# Altium PCB Arduino_DUE_Magic_Pen_rev02.PcbDoc (part 2 of 2)
Units mil, origin at the board's own origin, x right, y up, seen from the top; angles counter-clockwise.
Board outline 4416.66 x 2112 mil, 4 copper layers (Top Layer, Mid-Layer 1, Mid-Layer 2, Bottom Layer); 151 components, 188 nets, 610 pads, 219 vias.
Unrouted connection lines stored in the file: 1.
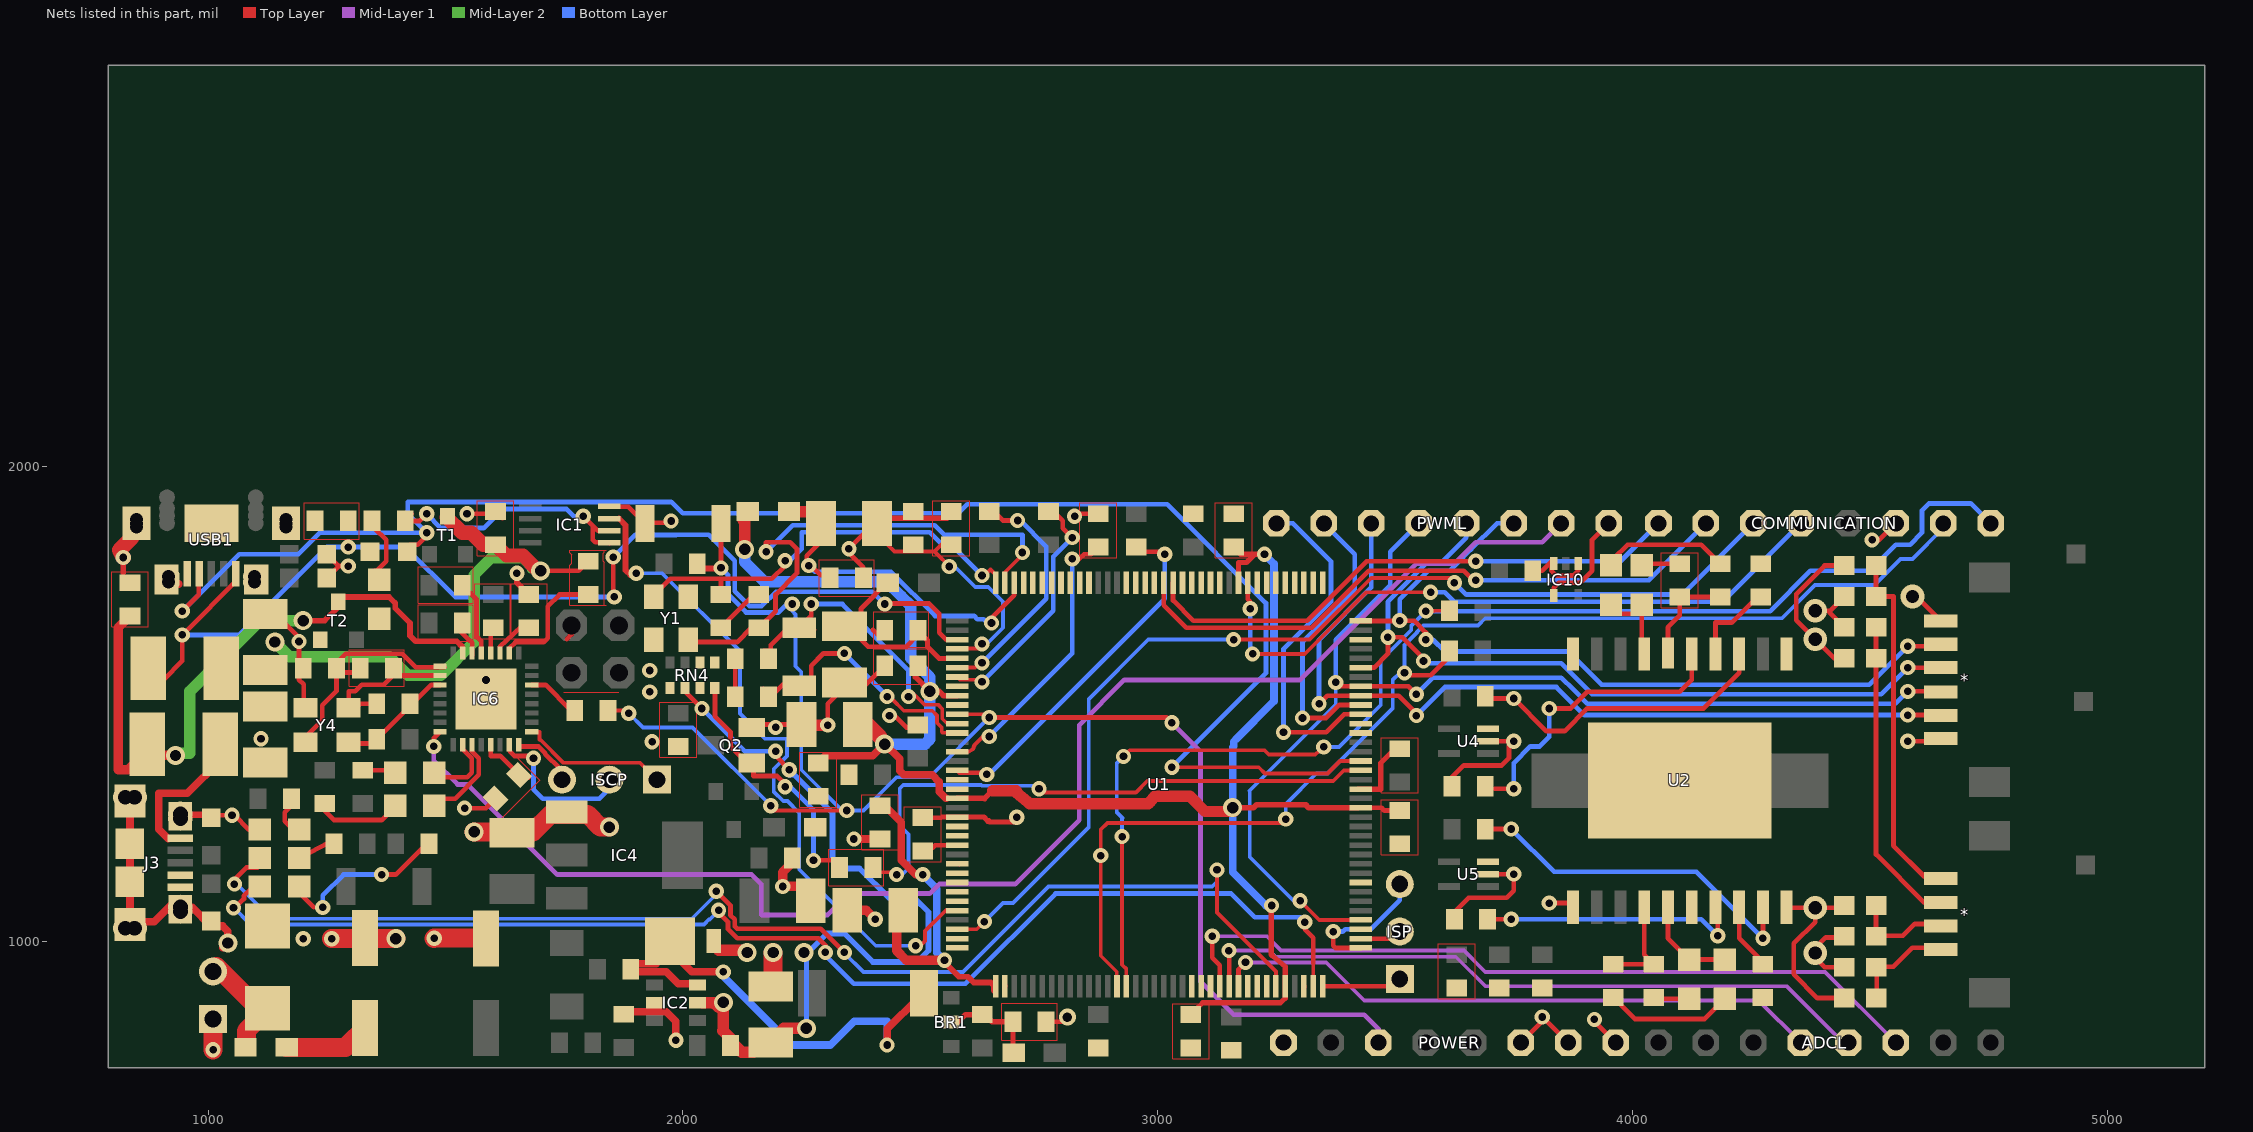
[diagram p4: the nets of this part, all layers, seen from the top]

## Via types
v1: diameter 32, hole 16, Top Layer to Bottom Layer, 189 vias
v2: diameter 40, hole 24, Top Layer to Bottom Layer, 23 vias
v3: diameter 50, hole 28, Top Layer to Bottom Layer, 5 vias
v4: diameter 32/32/32/32 (per signal layer), hole 16, Top Layer to Bottom Layer, 1 vias
v5: diameter 36, hole 20, Top Layer to Bottom Layer, 1 vias

## Nets (pads, with @x,y where several pads share a name; then routed paths per layer and width w, separated by ;. In a path a pad name is that pad's centre, name@x,y a point inside that pad or via, vN(x,y) a via of type N, cw(c..) or ccw(c..) an arc to the next point about the centre after c; other vN are vias at no path point) (continued)
GND: *.6 C1.- C2.- C3.- C4.1 C5.1 C6.1 C7.1 C8.1 C9.1 C10.1 C11.- C12.1 C13.1 C14.1 C15.1 C16.1 C17.1 C18.1 C19.1 C21.1 C22.1 C23.1 C24.1 C25.2 C26.2 C27.- C28.2 C29.- C30.1 C31.1 C32.1 C33.- C34.1 C35.- C36.2 C37.2 C38.2 C39.1 C40.1 C41.- C43.2 C44.2 C45.2 COMMUNICATION.6 D1.A D4.P$2 DM2.A DM4.A DM6.A DM8.A IC1.4 IC2.2 IC4.1 IC6.3 IC6.28 IC6.33 IC10.1 IC10.3 J3.P5 J3.P$1 J3.P$2 J3.P$3 J3.P$4 J3.P$5 J3.P$6 J3.P$7 J3.P$8 J3.S1 J3.S2 J3.S3 J3.S4 J3.S5 J3.S6 L.C ON.C P1.1 PC1.- PC2.- POWER.6 POWER.7 Q2.2 R2.2 R7.1 R8.1 R11.2 R18.2 RESET.2 RN4.1 RN4.2 RN4.5 RN4.7 T2.3 U1.12 U1.33 U1.44 U1.46 U1.54 U1.58 U1.74 U1.106 U1.126 U2.P$1 U2.P$10 U2.P$11 U2.P$20 U2.P$21 U4.3 U5.3 USB1.5 USB1.P$1 USB1.P$2 USB1.P$3 USB1.P$4 USB1.P$5 USB1.P$6 USB1.P$7 USB1.P$8 USB1.P$9 USB1.P$10 USB1.P$11 USB1.S1 USB1.S2 USB1.S3 USB1.S4 Y1.2 Y1.4 Y4.2 Y4.4 Z1.2 Z2.2 Z3.1 Z4.1 Z5.1 | length 5909.3
  Top Layer w2: 3471.3,1312.01 3494,1312.01 3494.31,1312.31 3504.31,1312.31 3504.61,1312.01 3548.7,1312.01
  Top Layer w8: U1.33@2717.55,1755.2 U1.33@2717.98,1761 ; U1.126@3428.18,1320.16 3429.82,1320.16 U1.126@3429.98,1320
  Top Layer w10: J3.S2@835,1051 J3.P$5@845,1041 ; J3.P$7@928,1083 J3.P$7@941,1083 ; Z3.1@1006,1259.74 1011.26,1265 v1(1050,1265) ; v1@1054.66,1266 1085.66,1235 ON.C@1100,1235 ; C27.-@1116,1675.06 1119.94,1679 1152.01,1679 1191,1640.01 v1(1191,1631) 1191,1551 1201,1541 Y4.4@1201,1496 ; Z2.2@1249.37,1765 1274.37,1790 ; Z1.2@1249.37,1815 1274.37,1790 ; Y4.2@1291,1416 C36.2@1355,1416 ; v1(1295,1790) 1274.37,1790 ; C36.2@1355,1435 C36.2@1355,1425 C40.1@1427.5,1497.5 ; C40.1@1425,1500 1430,1500 1469.53,1539.53 IC6.3@1488.54,1539.53 ; IC6.33@1530,1536 1536.76,1530.1 1572.52,1532.53 IC6.33@1643.45,1532.53 ; v1(1540,1280) 1585,1280 R18.2@1605.25,1300.25 ; v1(1545,1900) 1601,1900 1606,1905 R2.2@1620,1891 ; PC2.-@1584.49,1006 PC2.-@1585,1005.49 ; IC6.28@1594.84,1606.46 1594.84,1637.01 1594.84,1654.84 C30.1@1600,1660 ; C29.-@1610,1240.06 C29.-@1620.06,1230 ; IC1.4@1845,1915.59 1845.59,1915 1885,1915 RESET.2@1920,1880 ; RESET.2@1922,1883 1924,1881 v1@1975,1881 ; C22.1@2080,1660 C22.1@2095.71,1660 ; C22.1@2085,1665 2146,1726 C21.1@2160,1726 ; C23.1@2110,1515 C24.1@2110,1581.5 ; v2@2130,981 v2(2135,976) ; Q2.2@2150,1456 2275.94,1456 C11.-@2245.94,1486 ; 2169.25,1531.75 2175,1526 2175,1511 ; C41.-@2170,900.06 C41.-@2190,920.06 ; C1.-@2239.06,1115 C1.-@2269.06,1085 ; v1(2305,1455) 2305,1500 2345,1540 2385,1540 C15.1@2425,1580 ; C32.1@2380,1765 2380,1787.15 2349.53,1817.62 v1(2349.53,1826.47) C33.-@2384.06,1861 ; v1(2435,1475) 2445.71,1475 2470.71,1450 C6.1@2480,1450 ; C14.1@2505,1260 2544,1260 2545.1,1261.1 U1.58@2577.78,1261.1 ; C34.1@2765,830 2787.99,830 2800,830 v5(2810,840) ; v1@2826.3,1896.3 v1(2825,1895) 2826.3,1893.7 2826.3,1903.7 2830,1900 R8.1@2875,1900 ; POWER.6@3770,805 3780.8,805 3782.4,803.4 3810,831 v1(3810,840) 3811,840 POWER.7@3865,786 ; C37.2@3780,1780 3810,1780 3829.41,1799.41 3829.41,1780.59 3840,1770 3875,1770 3885.59,1780.59 IC10.1@3885.59,1795 ; v1(3825,1080) 3866,1080 U2.P$1@3875,1071 ; U2.P$10@4325,1071 4326,1070 v3(4385,1070) ; DM6.A@4446.54,880 4390,880 4340,930 4340,995 4385,1040 v3(4385,1070) ; DM8.A@4446.54,1075 4441.54,1070 v3(4385,1070) ; DM2.A@4446.54,1596 4425,1596 v3(4385,1636) 4345,1676 4345,1731 4405,1791 DM4.A@4446.54,1791 ; v1(4505,1845) 4520,1845 COMMUNICATION.6@4555,1880 ; v1(4580,1421) 4644.61,1421 *.6@4650,1426.39
  Top Layer w11: U1.58@2577.78,1261.1 2633.88,1261.1 2641.98,1253 ; 2643.98,1253 2645.98,1251 v1@2701.98,1251 ; U1.74@2678.18,904.8 U1.74@2678.18,905.8 ; U1.106@3308.1,902.88 U1.106@3308.1,904.8 ; U1.126@3421.98,1320 3429.98,1320 3469.98,1320 3469.98,1374.98 C8.1@3495,1400
  Top Layer w12: 821,1776 v1(821,1808.06) ; v1(1650,1775) 1650,1755 C38.2@1675,1730 ; C33.-@2409.06,1880 2420.06,1891 2556,1891 C25.2@2565,1900 ; 2641.98,1253 2643.98,1253
  Top Layer w14: J3.P$1@941,1282 941,1266 999.74,1266 Z3.1@1006,1259.74
  Top Layer w16: J3.S2@835,1051 J3.P$3@835,1311 ; J3.P$5@845,1041 886,1041 J3.P$7@928,1083 ; USB1.P$10@897.69,1749.19 USB1.P$10@937.69,1752.19 ; J3.P$7@941,1078 951,1078 958,1071 966,1071 1005.37,1031.63 1030.37,1031.63 1041,1021 v2(1041,996) v2@1031,986 ; R11.2@1870,851 1965,851 1985,831 v1(1985,791) ; v1(2360,1215) 2405,1215 2414,1206 C10.1@2420,1206
  Top Layer w20: C18.1@2230,1185 2230,1165 2210,1145 v1(2210,1115) C1.-@2239.06,1115 ; C3.-@2345.94,1065 2386,1065 v1(2405,1046)
  Top Layer w24: D4.P$2@2075,981 v2@2130,981 ; C11.-@2275.94,1456 2276.94,1455 v1(2305,1455)
  Top Layer w32: v1(821,1808.06) 812.65,1824.03 838.98,1850.36 USB1.P$5@838.98,1856
  Top Layer w40: P1.1@1000,836 1010,826 v1(1010,771) ; v1(1260,1005) v2(1395,1005) ; v1@1475,1005 v1(1476,1006) ; v1@1480,1006 PC2.-@1584.49,1006 ; v2(1560,1230) 1684,1230 1721,1267 1798.94,1267 1825.94,1240 v2(1845,1240) ; C41.-@2190,920.06 v2(2190,976)
  other v1: 1200,1005 2702.98,1261 1935,1420 1111,1426 2195,1450 1930,1525 1585,1550 1930,1570 1975,1885
JTAG_TCK: U1.28
JTAG_TDI: U1.29
JTAG_TDO: U1.30 | length 12.3
  Top Layer w8: U1.30@2776.6,1755.2 2775.98,1753.82 2775.98,1745 U1.30@2777.98,1745
JTAG_TMS: U1.31 | length 6.8
  Top Layer w8: U1.31@2756.92,1755.2 U1.31@2756.98,1762
L13: IC1.1 IC1.2 RN3C.1 | length 572
  Top Layer w10: RN3C.1@1427.99,1900 1415,1887.01 RN3C.1@1415,1885 1445,1885 v1(1460,1900) ; v1(1790,1895) 1810,1875 ; IC1.1@1845,1838.81 1843.81,1840 1815,1840 1810,1845 1810,1875 ; IC1.2@1845,1864.41 1820.59,1864.41 1810,1875
  Bottom Layer w10: v1(1460,1900) 1490,1870 1580,1870 1620,1910 1755,1910 1770,1895 v1(1790,1895)
M1_EN: RM2.1
M1_IN: RM1.1 U5.2 | length 243.2
  Top Layer w10: RM1.1@3617.5,1053.5 3655,1091 3735,1091 3750,1106 v1(3750,1141) U5.2@3696,1141
M2_EN: RM5.1
M2_IN: RM4.1 U4.2 | length 249.7
  Top Layer w10: RM4.1@3620,1326 3620,1345 3645,1370 3725,1370 3740,1385 3740,1411 v1(3750,1421) U4.2@3696,1421
M_OUT1: R24.2 R25.2 U2.P$4 | length 218.3
  Top Layer w10: R25.2@3955,951 R25.2@3960,951 R24.2@4045,951 4025,971 U2.P$4@4025,1071
M_OUT2: L1.C L2.A U2.P$5 | length 203.6
  Top Layer w10: U2.P$5@4075,1071 4075,1006 L2.A@4120,961 L1.C@4195,961
M_OUT3: R26.2 R27.2 U2.P$16 | length 194.4
  Top Layer w10: U2.P$16@4075,1626 4075,1661 4100,1686 R27.2@4100,1725 R26.2@4185,1725
M_OUT4: L3.C L4.A U2.P$17 | length 151.7
  Top Layer w10: L4.A@3955,1689.66 4020,1689.66 4020,1610 U2.P$17@4025,1605
MASTER-RESET: C20.1 POWER.3 R23.2 RESET.1 U1.47 | length 3299.4
  Top Layer w8: R23.2@1842.13,1485.75 1880.07,1485.75 v1(1885.82,1480) ; v1(2185,1285) 2195,1275 v1(2345,1275) ; U1.47@2577.78,1477.64 2634.62,1477.64 2641.26,1471 v1(2645,1471)
  Top Layer w10: RESET.1@2070,1856 2080,1846 v1(2080,1786) ; v1(2645,1471) 3019,1471 v1(3030,1460)
  Top Layer w12: C20.1@2030,1785 2079,1785 v1(2080,1786)
  Mid-Layer 1 w10: v1(3030,1460) 3090,1400 3090,915 3160,845 3435,845 3465,815 POWER.3@3465,786
  Bottom Layer w8: v1@1889.63,1470.75 1890,1471.12 1890,1475.82 v1(1885.82,1480) 1915.82,1450 2020,1450 v1@2190,1280 ; v1(2230,1710) 2230,1695 2236.98,1688.02 2236.98,1579.02 2249,1567 2249,1360.8 2334.8,1275 v1(2345,1275) 2380,1275 2450,1345 2519,1345 v1(2645,1471)
  Bottom Layer w10: v1(2080,1786) 2095,1771 2095,1731 2133,1693 2132,1692 2200.8,1692 2218.8,1710 v1(2230,1710)
MISO: ISP.1 U1.108 | length 162.6
  Top Layer w10: U1.108@3347.47,904.8 3509.8,904.8 ISP.1@3510,905
MISO2: IC6.17 ISCP.1 | length 315.6
  Top Layer w8: IC6.17@1681.46,1441.1 1698,1441.1 1698,1424.39 1699.39,1423 1700.74,1423 1747.31,1376.43 ; 1746.64,1375.75 1909.25,1375.75 ISCP.1@1945,1340
MOSI: ISP.3 U1.109 | length 278
  Top Layer w8: U1.109@3428.18,985.51 U1.109@3429.98,985
  Top Layer w10: v1(3370,1020) 3370,990 3374.49,985.51 U1.109@3428.18,985.51
  Bottom Layer w10: v1(3370,1020) 3390,1020 3395,1025 3448.54,1025 3510,1086.46 ISP.3@3510,1105
MOSI2: IC6.16 ISCP.3 | length 134.1
  Top Layer w10: IC6.16@1653.9,1413.54 1657.44,1410 1695.36,1410 1710,1395.36 1710,1394 1741.25,1362.75 1742.25,1362.75 1745,1360 ISCP.3@1745,1340
N$1: IC6.26 R21.1 | length 513.5
  Top Layer w2: 1761.3,1707.01 1761.3,1791.6 1766,1796.3 1766,1813.7 1761.3,1818.4 1761.3,1822.99 ; 1833.7,1707.01 1833.7,1798.37 1832,1800.07 1832,1817.47 1833.7,1819.17 1833.7,1822.99
  Top Layer w10: IC6.26@1634.21,1606.46 1634.21,1616.83 1647.38,1630 1706.69,1630 1715,1638.31 1715,1705 1740,1730 R21.1@1800,1730 ; 1755,1636 1765,1646
Net*_1: *.1@4650,1132.18 DM3.A DM4.C | length 743.5
  Top Layer w10: DM4.C@4513.46,1791 DM3.A@4513.46,1726 4550,1726 4550,1201 4615,1136 *.1@4640,1136
Net*_2: *.2@4650,1081 DM1.A DM2.C | length 657.1
  Top Layer w10: DM1.A@4513.46,1661 DM2.C@4513.46,1596 4513.46,1182.54 4615,1081 *.2@4650,1081
Net*_3: *.3@4650,1031.79 DM7.A DM8.C | length 186.9
  Top Layer w10: DM8.C@4513.46,1076 DM8.C@4513.46,1075 4513.46,1011 4570,1011 4595,1036 *.3@4625,1036
Net*_4: *.4@4650,982.57 DM5.A DM6.C | length 206.6
  Top Layer w10: DM6.C@4515,881 4515,946 4550,946 4590,986 *.4@4640,986
NetBR1_2: BR1.2 C34.2 JR1.2 L3.1 | length 199.5
  Top Layer w10: L3.1@2695,765 C34.2@2695,830
  Top Layer w12: BR1.2@2575,825 2595,845 2636,845 2651,830 C34.2@2695,830
NetIC6_13: IC6.13 R18.1 | length 108.5
  Top Layer w10: IC6.13@1595,1400 1595,1390 1615,1390 1660.25,1344.75 R18.1@1674.75,1344.75
NetJ3_P4: J3.P4
NetL1_A: L1.A R25.1 | length 264.1
  Top Layer w10: R25.1@3965,876 4005,836 4152.68,836 L1.A@4195,878.32
NetL2_C: L2.C R24.1 | length 87.3
  Top Layer w10: R24.1@4032.68,878.32 L2.C@4120,878.32
NetL3_A: L3.A R27.1 | length 90.7
  Top Layer w10: L3.A@4020,1777.34 L3.A@4027.55,1784.89 ; L3.A@4020,1795 4061.3,1795 R27.1@4100,1795
NetL4_C: L4.C R26.1 | length 269
  Top Layer w10: L4.C@3960,1805 3990,1835 4145,1835 R26.1@4185,1795 ; R26.1@4170,1786 R26.1@4185,1786
NetL_A: L.A RN3C.2 | length 127.8
  Top Layer w10: RN3C.2@1350,1870 1375,1845 1375,1800 1350,1775 1350,1780 L.A@1355,1775
NetON_A: ON.A RN3D.2 | length 82.8
  Top Layer w10: RN3D.2@1175,1285 1161,1271 1161,1252.34 ON.A@1192.34,1221
NetPOWER_1: POWER.1
NetQ2_1: Q2.1 R3.2 RN4.8 | length 549.4
  Top Layer w10: RN4.8@2067.24,1533.43 2067.24,1473.71 2099.94,1441.01 2099.94,1410.06 2148.31,1361.69 2148.31,1347.6 2198.4,1347.6 2215,1331 v1(2215,1325) ; v1(2275,1170) 2320,1170 2330,1160 R3.2@2330,1155
  Bottom Layer w10: v1(2215,1325) 2226,1325 2275,1276 v1(2275,1170)
NetR4_1: R4.1 U1.53 | length 757.9
  Top Layer w10: U1.53@2577.78,1359.53 2582.56,1354.75 2636.25,1354.75 v1(2640,1351) ; R4.1@2960,1820 3020.83,1820 3015,1814.17 v1(3015,1815)
  Bottom Layer w10: v1(2640,1351) 2645,1351 3015,1721 v1(3015,1815)
NetR5_2: R5.2 U1.43 | length 513.7
  Top Layer w8: U1.43@2577.78,1556.38 2583.56,1550.6 2625.4,1550.6 v1(2630,1546)
  Top Layer w10: R5.2@2775,1900 2785,1900 2800,1885 2800,1870 v1(2820,1850)
  Bottom Layer w10: v1(2630,1546) 2780,1696 2780,1810 v1(2820,1850)
NetR6_2: R6.2 U1.42 | length 494.7
  Top Layer w8: U1.42@2576,1576 2615,1576 v1@2620,1581
  Top Layer w10: R6.2@2650,1910 2674,1886 v1(2705,1886)
  Bottom Layer w10: v1(2630,1586) 2765,1721 2765,1831 2710,1886 v1(2705,1886)
NetR8_2: R8.2 U1.51 | length 582.7
  Top Layer w8: U1.51@2590,1401 2599,1398 2611,1404 2614,1413 2632,1431 v1(2645,1431)
  Top Layer w10: v1(2820,1805) 2835,1805 2837.01,1807.01 2845,1815 2860,1815 R8.2@2875,1830
  Bottom Layer w10: v1(2645,1431) 2820,1606 v1(2820,1805)
NetR14_2: R14.2 TX1.A | length 171.6
  Top Layer w10: R14.2@1245,1290 1245,1275 1265,1255 1365,1255 TX1.A@1385,1275
NetR15_2: R15.2 RX1.A | length 68.7
  Top Layer w10: R15.2@1325,1360 RX1.A@1393.66,1360
NetRM1_2: RM1.2 U2.P$7 | length 561.6
  Top Layer w10: RM1.2@3695,1046 v1(3745,1046) ; U2.P$7@4175,1071 4180,1066 v1(4180,1011)
  Bottom Layer w10: v1(3745,1046) 4145,1046 v1(4180,1011)
NetRM2_2: RM2.2 U2.P$8 | length 121.6
  Top Layer w10: U2.P$8@4225,1071 4225,1006 RM2.2@4265,966
NetRM3_2: RM3.2 U2.P$9 | length 740.3
  Top Layer w10: RM3.2@3695,1236 v1(3745,1236) ; v1(4275,1006) U2.P$9@4275,1071
  Bottom Layer w10: v1(3745,1236) 3835,1146 4135,1146 v1(4275,1006)
NetRM4_2: RM4.2 U2.P$15 | length 631.8
  Top Layer w10: 3709.9,1321.1 3710,1321 v1(3750,1321) ; v1(3825,1490) 3870,1490 3905,1525 4100,1525 4125,1550 U2.P$15@4125,1605
  Bottom Layer w10: v1(3750,1321) 3750,1375 3785,1410 3805,1410 3825,1430 v1(3825,1490)
NetRM5_2: RM5.2 U2.P$14 | length 158.6
  Top Layer w10: U2.P$14@4175,1626 4175,1671 4209.29,1671 4254.29,1716 RM5.2@4270,1716
NetRM6_2: RM6.2 U2.P$13 | length 645.7
  Top Layer w10: RM6.2@3700,1511 v1(3750,1511) 3818.68,1442.32 3857.32,1442.32 3905,1490 4150,1490 4225,1565 U2.P$13@4225,1605
  Bottom Layer w10: v1(3750,1511) v1@3751,1510
NetRN3A_2: RN3A.2 RX.A | length 82.2
  Top Layer w10: RX.A@1191.34,1175 1255.4,1208.06 RN3A.2@1265,1205
NetRN3B_2: RN3B.2 TX.A | length 338.6
  Top Layer w10: TX.A@1192.34,1101 1222.34,1071 ; v4(1365,1140) 1395,1140 RN3B.2@1465,1210
  Bottom Layer w10: v1(1241,1071) 1241,1096 1285,1140 v4(1365,1140)
PIN22: U1.1
PIN23: U1.7
PIN24: U1.8
PIN25: U1.13 | length 4.8
  Top Layer w8: U1.13@3110.98,1760 U1.13@3111.25,1755.2
PIN26: U1.14
PIN27: U1.15 | length 0.3
  Top Layer w8: U1.15@3071.88,1754.9 U1.15@3071.88,1755.2
PIN28: U1.16 | length 2
  Top Layer w8: U1.16@3051.98,1753.2 U1.16@3052.19,1755.2
PIN29: U1.19
PIN30: U1.22
PIN31: U1.26 | length 10.8
  Top Layer w8: U1.26@2854.98,1766 U1.26@2855.34,1755.2
PIN32: U1.32
PIN33: U1.55 | length 4.3
  Top Layer w8: U1.55@2577.78,1320.16 U1.55@2581.98,1321
PIN34: U1.59 | length 4.2
  Top Layer w8: U1.59@2577.78,1241.42 U1.59@2581.98,1241
PIN35: U1.60
PIN36: U1.116 | length 4.3
  Top Layer w8: U1.116@3428.18,1123.31 3428.18,1122.8 U1.116@3431.98,1123
PIN37: U1.63 | length 4.5
  Top Layer w8: U1.63@2577.78,1162.68 U1.63@2581.98,1161
PIN38: U1.64
PIN39: U1.65
PIN40: U1.66
PIN41: U1.67
PIN42: U1.71
PIN43: U1.72 | length 3.8
  Top Layer w8: U1.72@2573.98,985 U1.72@2577.78,985.51
PIN44: U1.101
PIN45: U1.100 | length 0.2
  Top Layer w8: U1.100@3189.99,904.8 U1.100@3189.98,905
PIN46: ADCL.4 U1.99 | length 1296.3
  Top Layer w10: U1.99@3170.3,904.8 3170.3,940.3 v1(3185,955)
  Mid-Layer 1 w8: v1(3185,955) 3355,955 3435,875 4266,875 ADCL.4@4355,786
PIN47: ADCL.5 U1.98 | length 1461.5
  Top Layer w8: U1.98@3149.98,905 U1.98@3150.62,904.8
  Top Layer w10: v1(3150,980) 3150.62,979.38 U1.98@3150.62,904.8
  Mid-Layer 1 w8: v1(3150,980) 3235,980 3248,967 3628,967 3690,905 4325,905 4444,786 ADCL.5@4455,786
PIN48: ADCL.6 U1.97 | length 1644.6
  Top Layer w10: v1(3115,1010) 3115,965 3130.93,949.07 U1.97@3130.93,904.8
  Mid-Layer 1 w8: v1(3115,1010) 3230,1010 3260,980 3645,980 3690,935 4406,935 ADCL.6@4555,786
PIN49: U1.96 | length 7.9
  Top Layer w8: U1.96@3109.98,897 U1.96@3111.25,904.8
PIN50: U1.95
PIN51: U1.94 | length 1.7
  Top Layer w8: U1.94@3070.18,904.8 U1.94@3071.88,904.8
PWM2: *.2@4650,1625.21 PWML.3 U1.144 | length 1679.9
  Top Layer w8: U1.144@3421.98,1673 U1.144@3428.18,1674.49
  Top Layer w10: U1.144@3428.18,1674.49 3509.49,1674.49 v1(3510,1675) 3540,1675 3565,1650 v1(3565,1635) ; v1(4580,1621) 4645.79,1621 *.2@4650,1625.21
  Bottom Layer w10: v1(3510,1675) 3510,1720 3570,1780 3615,1780 3645,1810 3645,1810.36 3659.64,1825 3660,1825 3715,1880 PWML.3@3750,1880 ; v1(3565,1635) 3580,1635 3605,1610 3865,1610 3935,1540 4499,1540 v1(4580,1621)
PWM3: *.3@4650,1576 PWML.4 U1.139 | length 1676.8
  Top Layer w8: U1.139@3421.98,1577 U1.139@3428.18,1576.06
  Top Layer w10: U1.139@3428.18,1576.06 3456.06,1576.06 3485,1605 v1(3485,1640) 3515,1640 3560,1595 v1(3560,1590) ; v1(4580,1576) *.3@4650,1576
  Bottom Layer w10: v1(3485,1640) 3485,1715 3565,1795 3595,1795 3650,1850 PWML.4@3650,1880 ; v1(3560,1590) 3565,1585 3850.2,1585 3915.2,1520 4524,1520 v1(4580,1576)
PWM4: *.4@4650,1524.82 | length 1153.5
  Top Layer w10: v1(4580,1526) 4648.82,1526 *.4@4650,1524.82
  Bottom Layer w10: v1(3545,1520) 3579.9,1554.9 3850.3,1554.9 3876,1529.2 3905.2,1500 4554,1500 v1(4580,1526)
PWM5: *.5@4650,1475.61 PWML.6 U1.136 | length 1812.4
  Top Layer w10: v1(3340,1500) 3357.01,1517.01 U1.136@3428.18,1517.01 3507.99,1517.01 3545,1480 v1(3545,1475) ; v1(4580,1476) 4649.61,1476 *.5@4650,1475.61
  Bottom Layer w10: v1(3340,1500) 3340,1635 3450,1745 PWML.6@3450,1880 ; v1(3545,1475) 3605,1535 3840,1535 3899,1476 v1(4580,1476)
PWM6: PWML.7 U1.135 | length 623.2
  Top Layer w8: U1.135@3421.98,1497 U1.135@3428.18,1497.32
  Top Layer w10: v1(3305,1470) 3355,1470 3382.32,1497.32 U1.135@3428.18,1497.32
  Bottom Layer w10: v1(3305,1470) 3305,1630 3415,1740 3415,1815 PWML.7@3350,1880
PWM7: PWML.8 U1.134 | length 728.3
  Top Layer w10: v1(3265,1440) 3355,1440 3392.64,1477.64 U1.134@3428.18,1477.64
  Bottom Layer w10: PWML.8@3250,1880 3285,1880 3365,1800 3365,1715 3265,1615 v1(3265,1440)
PWM8: U1.133 | length 6.3
  Top Layer w8: U1.133@3421.98,1457 U1.133@3428.18,1457.95
PWM9: U1.132 | length 14.2
  Top Layer w8: U1.132@3413.98,1438 3417.71,1438.27 U1.132@3428.18,1438.27
PWM11: U1.20
PWM12: U1.21
PWM13: IC1.3 U1.68 | length 1417.1
  Top Layer w8: v1(2490,990) 2500,990 2510,1000 2510,1021 U1.68@2555,1066
  Top Layer w12: IC1.3@1865,1890 1879,1876 1879,1781 1889.13,1770.87 1893.26,1775 v1(1901.63,1775)
  Bottom Layer w8: v1(1901.63,1775) 1956,1775 2120,1611 2120,1479.3 2173.3,1426 2219,1426 2219,1390.06 2191,1362.06 2191,1315.06 2211.06,1295 2219.94,1295 2245,1269.94 2245,1151 2406,990 v1(2490,990)
RD+: IC6.29 R20.1 | length 158.9
  Top Layer w10: R20.1@1535,1750 1565,1720 1565,1642.01 1575,1632.01 IC6.29@1575,1607.62
RD-: IC6.30 R19.1 | length 187
  Top Layer w2: 1437.01,1631.3 1440.6,1631.3 1441.3,1632 1458.7,1632 1459.4,1631.3 1552.99,1631.3
  Top Layer w10: R19.1@1530,1660 1530,1654.17 1552.16,1632.01 1552.99,1632.01 1552.99,1631.3 1556.3,1627.99 IC6.30@1556.3,1600.94
RESET_CMD: IC6.22 R23.1 | length 125.4
  Top Layer w10: IC6.22@1681.46,1539.53 1710.47,1539.53 1762.72,1487.28 1762.49,1487.28 R23.1@1784.11,1481.75
RX: IC10.4 PWML.1 U1.27 | length 226.2
  Top Layer w10: IC10.4@3834.41,1728.08 3834.41,1744.41 3845,1755 3890,1755 3915,1780 3915,1845 PWML.1@3950,1880
RXD0: COMMUNICATION.2 U1.18 | length 1317.4
  Top Layer w10: U1.18@3012.82,1755.2 3012.82,1707.18 3060,1660 3325,1660 3445,1780 3645,1780 3665,1760 v1(3670,1760)
  Bottom Layer w10: v1(3670,1760) 4035,1760 COMMUNICATION.2@4155,1880
RXD1: U1.5
RXD2: U1.3
RXL: RX.C U1.103 | length 2713.5
  Top Layer w8: v1(3125,1150) 3125,1060 3249.04,935.96 U1.103@3249.04,904.8
  Top Layer w10: v1(1055,1120) 1055,1129.64 1080,1154.64 1080,1155 1103.66,1155 RX.C@1109.66,1161 ; v1(2070,1105) 2070.36,1105 2100,1075.36 2100,1054.8 2109,1045.8 2109,1030.8 2114,1025.8 2290.2,1025.8 v1(2340,976)
  Bottom Layer w8: v1@1060,1120 1133,1047 2018.56,1047 2070,1098.44 v1(2070,1105) ; v1@2339.5,975.5 2380,935 2590,935 2770,1115 3115,1115 3125,1125 v1(3125,1150) 3125,1128.91
RXL-U2: IC6.10 RX1.C | length 140.6
  Top Layer w10: RX1.C@1485,1345 1545,1345 1555,1355 1555,1385 1535.79,1404.21 IC6.10@1535.79,1413.54
SCK2: IC6.15 ISCP.2 | length 310.1
  Top Layer w10: IC6.15@1635,1400 1645,1390 v1@1680,1390
  Bottom Layer w10: v1(1685,1385) 1685,1320 1705,1300 1824,1300 1845,1321 ISCP.2@1845,1340
SCL0-3: COMMUNICATION.8 RN5B.2 U1.87 | length 2706.5
  Top Layer w8: v1(2925,1220) 2925,949.98 2933.98,941 2933.98,905 U1.87@2934.08,904.8 ; v1(2927.98,1389) 2940.98,1402 3224.98,1402 3233.98,1393 3331.98,1393 v1(3349.98,1409) ; v1(3565,1695) 3581,1695 3580,1696 RN5B.2@3610,1696
  Bottom Layer w8: v1(2925,1220) 2925,1258.02 2925.98,1259 2913.98,1271 2913.98,1375 v1(2927.98,1389) ; v1(3349.98,1409) 3381.98,1409 3470,1497.02 3470,1590.91 3534,1654.91 3534,1664 v1(3565,1695)
  Bottom Layer w10: v1(3565,1695) 4290,1695 4375,1780 4500,1780 4555,1835 4585,1835 4610,1860 4610,1907 4625,1922 4713,1922 COMMUNICATION.8@4755,1880
SCL1: COMMUNICATION.3 U1.70 | length 2218.6
  Top Layer w8: U1.70@2577.78,1024.88 2618.88,1024.88 v1(2635,1041) ; v1(3160,1635) 3320,1635 3450,1765 3615,1765 v1(3625,1755)
  Bottom Layer w8: v1(2635,1041) 2674,1080 2695,1080 2855,1240 2855,1510 2980,1635 v1(3160,1635)
  Bottom Layer w10: v1(3625,1755) 3650,1730 4105,1730 COMMUNICATION.3@4255,1880
SDA0-3: COMMUNICATION.7 RN5A.1 U1.86 | length 2609.3
  Top Layer w8: U1.86@2914.4,904.8 U1.86@2913.78,908.8 ; U1.86@2915.98,905 U1.86@2913.78,908.8 ; v1(3269.98,1257) 3261.98,1249 2894,1249 2880,1235 v1(2880,1180) 2880,968.98 2913.78,935.2 U1.86@2913.78,908.8
  Top Layer w10: v1@3510,1565 3515,1560 3575,1560 RN5A.1@3610,1595 ; RN5A.1@3610,1605 3615,1610 RN5A.1@3625,1610
  Bottom Layer w8: v1(3269.98,1257) 3269.98,1289 3333.98,1353 3358,1353 3495,1490 3495,1550 3510,1565 v1(3520,1565) 3520,1623.94 3546,1649.94 3546,1651 3560,1665 3675,1665 3690,1680 4315,1680 4385,1750 4510,1750 4565,1805 4590,1805 COMMUNICATION.7@4655,1870
SDA1: COMMUNICATION.4 U1.9 | length 1439.8
  Top Layer w8: U1.9@3189.98,1753 U1.9@3189.99,1755.2 ; v1(3200,1605) 3310,1605 3440,1735 v1(3575,1735)
  Top Layer w10: U1.9@3189.98,1753 3189.98,1720.02 3195,1715 v1(3195,1700)
  Bottom Layer w10: v1(3195,1700) 3195,1610 v1(3200,1605) ; v1(3575,1735) 3605,1735 3625,1715 4190,1715 COMMUNICATION.4@4355,1880
SPCK: ISP.2 U1.110 | length 81.9
  Top Layer w10: U1.110@3428.18,1005.2 3428.38,1005 ISP.2@3510,1005
SS0/PWM10: U1.102 U1.111 | length 6.9
  Top Layer w8: U1.102@3229.36,904.8 U1.102@3229.98,905 ; U1.111@3421.98,1025 U1.111@3428.18,1024.88
SS1/PWM4: PWML.5 U1.112 U1.137 | length 1332
  Top Layer w8: v1(3300,1085) 3295.87,1089.13 3340.43,1044.57 U1.112@3428.18,1044.57
  Top Layer w10: v1(3375,1545) 3383.31,1536.69 U1.137@3428.18,1536.69 3528.31,1536.69 3545,1520
  Bottom Layer w8: v1(3300,1085) 3285.98,1085 3193.98,1177 3193.98,1316.02 3193.49,1316.51 3375,1498.02 v1(3375,1545)
  Bottom Layer w10: v1(3375,1545) 3375,1635 3490,1750 3490,1820 PWML.5@3550,1880
SS3: U1.142
SW: C42.2 D4.P$1 IC2.6 L4.P$1 | length 968.5
  Top Layer w10: D4.P$1@1943.78,952.3 D4.P$1@1972.48,981
  Top Layer w16: C42.2@1890,941 1901.3,952.3 D4.P$1@1943.78,952.3 ; C42.2@1905,935 1965,935 1990,910 IC2.6@2020.28,910 ; D4.P$1@1972.48,981 2018.48,935 v1(2085,935) ; v1(2430,781) 2430,814.78 L4.P$1@2496.22,881
  Bottom Layer w16: v1(2085,935) 2085,926 2230,781 2310.4,781 2360.4,831 2430,831 v1(2430,781)
TX: IC6.8 PWML.2 U1.2 | length 3073.3
  Top Layer w10: v1(1475,1410) 1475,1427.56 IC6.8@1488.54,1441.1
  Mid-Layer 1 w10: v1(1475,1410) 1475,1380 1525,1330 1545,1330 1735,1140 2145,1140 2165,1120 2165,1055 2305,1055 2350,1100 2520,1100 2540,1120 2700,1120 2835,1255 2835,1455 2930,1550 3300,1550 3545,1795 3625,1795 3670,1840 3810,1840 PWML.2@3850,1880
TXD0: COMMUNICATION.1 U1.17 | length 1162.7
  Top Layer w10: U1.17@3032.51,1755.2 3032.51,1717.49 3075,1675 3315,1675 3440,1800 v1(3670,1800)
  Bottom Layer w10: v1(3670,1800) 3975,1800 COMMUNICATION.1@4055,1880
TXD1: U1.6
TXD2: U1.4
TXL: TX.C U1.107 | length 2687
  Top Layer w8: U1.107@3327.78,904.8 3327.78,952.78
  Top Layer w10: v1(1053.09,1070) 1056.17,1070 1075,1088.83 1075,1095 1090,1110 TX.C@1095,1110 ; v1(2075,1065) 2079,1065 2080,1064 2080,1055 2095,1040 2095,1025 2114.24,1005.76 2285.24,1005.76 2300,991 v1(2300,976) ; v1(3310,1040) 3310,1025 3327.78,1007.22 3327.78,952.78
  Bottom Layer w8: v1(1053.09,1070) 1053.09,1071.09 1089.17,1035 2044,1035 2055,1046 2056,1045 2076,1065 v1(2075,1065)
  Bottom Layer w10: v1(2300,976) 2300,970 2360,910 2595,910 2785,1100 3155,1100 3205,1050 3300,1050 v1(3310,1040)
TXL-U2: IC6.11 TX1.C | length 161.8
  Top Layer w10: TX1.C@1485,1300 1519.8,1300 1570,1350.2 1570,1385 IC6.11@1555,1400
UOTGID: U1.129 USB1.4 Z5.2 | length 3562.6
  Top Layer w8: v1(3030,1366) 3212.98,1366 3225.98,1353 3357.98,1353 3384.19,1379.21 U1.129@3428.18,1379.21
  Top Layer w10: v1(945,1695) 980,1730 USB1.4@980,1775 ; Z5.2@1425,1835 1440.83,1835 1460,1854.17 v1(1460,1860)
  Bottom Layer w10: v1(945,1695) 1065,1815 1190,1815 1235,1860 v1(1460,1860) 1420,1900 1420,1925 1975.36,1925 1999.36,1901 2580,1901 2599,1920 3020,1920 3228,1712 3228,1564 v1(3030,1366)
UOTGVBOF: R3.1 U1.128 | length 1265.3
  Top Layer w8: R3.1@2405,1145 2414.49,1145 v1@2445,1145 ; v1(2750,1321) 2758,1313 2953.98,1313 2977.98,1337 3369.98,1337 3391.98,1359 3419.98,1359 U1.128@3428.18,1359.53
  Bottom Layer w8: v1(2450,1140) 2450,1128.51 2475,1153.51 2475,1225 2456.49,1243.51 2456.49,1321.49 2464,1329 2546.98,1329 2628.06,1329 2630.06,1327 2747.98,1327 2750,1324.98 v1(2750,1321)
USBVCC: C27.+ C35.+ F1.1 R2.1 R21.2 T1.1 | length 1101.4
  Top Layer w10: v2(1700,1780) 1780,1780 R21.2@1800,1800
  Top Layer w30: T1.1@1502,1893 1535,1860 1554,1860 1579,1835 R2.1@1595,1835 ; R2.1@1605,1835 1627.99,1812.01 1662.99,1812.01 v2@1690,1785
  Mid-Layer 2 w24: v2(1140,1630) 1171,1599 1381,1599 1420,1560 1490,1560 1560,1630 1560,1771 1599,1810 1602,1807 1663.25,1807 1682,1788.25 1682,1785 v2@1683,1785
USBVCCU2: C28.1 F2.1 IC6.31 T2.1 | length 1379.4
  Top Layer w12: v2(1200,1675) 1200,1687 1212,1675 1245,1675 1274,1704 T2.1@1274,1715 1284,1725 1380.9,1725 1393.62,1712.28 1393.62,1701.38 1425,1670 1425,1643.31 1437.01,1631.3 1523.7,1631.3 IC6.31@1535,1620
  Top Layer w20: C28.1@835,1685 810,1660 810,1361 831,1361 866,1396 871,1391 v2(931,1391)
  Mid-Layer 2 w24: v2(931,1391) 936,1396 961,1396 961,1526 1110,1675 v2(1200,1675)
VBG: C25.1 R7.2 U1.40 | length 513.7
  Top Layer w8: 2430,1836 2445.49,1820.51 2530,1820.51 ; C25.1@2565,1838.5 2547.5,1838.5 2530,1821 v1@2565.5,1785.5 ; U1.40@2577.78,1615.43 2582.98,1616 2622.98,1616 2630,1623.02 v1(2630,1626)
  Bottom Layer w8: v1(2561,1789.15) 2572.64,1789.15 2615.78,1746 2642.94,1746 2674,1714.94 2674,1660.06 2639.94,1626 v1(2630,1626)
VCC: *.1@4650,1674.43 | length 81.4
  Top Layer w10: v3(4590,1726) 4598.43,1726 *.1@4650,1674.43
VDDANA: C3.+ C10.2 L1.2 U1.73 | length 797.3
  Top Layer w8: U1.73@2657.49,896 U1.73@2658.49,904.8
  Top Layer w12: v1@2546.4,959.6 v1(2551,959.6) ; v1@2548.7,957.3 2581,925 2600,925 2612.51,912.49 2648.26,912.49 2654.7,906.05 2654.7,896 U1.73@2657.49,896
  Top Layer w16: C10.2@2415,1281 2429,1281 2460,1250 2460,1170 2490,1140 v1(2505,1140)
  Top Layer w20: C3.+@2462.5,1043.5 2472,1053 2450,1075 2450,980 2470.4,959.6 v1(2551,959.6)
  Bottom Layer w16: v1(2505,1140) 2535,1110 2535,975.6 v1(2551,959.6)
VDDOUT: C11.+ C12.2 C13.2 C14.2 C15.2 C16.2 C17.2 L5.1 U1.10 U1.45 U1.56 U1.61 U1.104 U1.124 | length 3928.2
  Top Layer w8: U1.124@3421.98,1281 U1.124@3428.18,1280.79
  Top Layer w10: C14.2@2525,1196 2531.05,1202.05 U1.61@2577.78,1202.05 ; U1.124@3428.18,1280.79 3471.78,1280.79 3477.57,1275 C17.2@3510,1275
  Top Layer w11: C16.2@3080,855 3095,870 3259,870 3268.73,879.73 U1.104@3268.73,904.8 3268.73,946.25 3241.98,968.8 ; C13.2@3160,1830 3175,1815 v1(3225,1815) ; U1.10@3170.3,1755.2 3170.3,1797.32 3187.32,1797.32 3205,1815 ; 3341.98,1281 U1.124@3421.98,1281
  Top Layer w11.5: U1.56@2577.78,1300.47 2635.45,1300.47
  Top Layer w12: C15.2@2490,1571 2490,1556 v2(2520,1526) 2540,1526 2548.99,1517.01 U1.45@2577.78,1517.01 ; 2635.45,1300.47 2651.98,1317 ; v2(3157.98,1281) 3201.98,1281 3207.98,1287 3312,1287 3318,1281 3341.98,1281 ; C13.2@3160,1830 C13.2@3172.84,1831.16 ; 3205,1815 v1(3225,1815) ; v1(3240,1075) 3239,1074 3239,971.78 3241.98,968.8
  Top Layer w16: C12.2@2285,1375 2300,1390 2400,1390 v2(2425,1415) ; v2@2425,1406.69 v2(2425,1415) ; U1.56@2555,1301 2554,1301 2540,1315 2540,1335 2525,1350 2465,1350 2456.3,1358.7 2456.3,1383.7 v2(2425,1415)
  Top Layer w24: L5.1@2126.69,1886 2126.69,1906.69 2130,1910 v2(2130,1825) ; 2651.98,1317 2701.98,1317 2701.98,1313 2725.98,1293 2729.98,1289 2979.98,1289 2983.98,1293 2993.98,1305 3067.98,1305 3099.98,1273 3159.98,1273 v2(3157.98,1281)
  Top Layer w32: C11.+@2373.7,1471 v2@2414.85,1429.85
  Bottom Layer w16: 3160.2,1420.2 3160.2,1410.2 3157.98,1407.98 v2(3157.98,1281) 3157.98,1145 3227.98,1075 v1(3240,1075) ; 3165,1425 3245,1505 3245,1795 v1(3225,1815)
  Bottom Layer w24: v2(2130,1825) 2130,1798.5 2171.5,1757 2429.3,1757 2460.25,1726.05 ; v2(2425,1415) 2510,1415 2520,1425 2520,1556 2480,1596 2480,1706.25 2460.25,1726
VDDOUTMI: C2.+ C9.2 L2.2 U1.41 | length 409
  Top Layer w10: C2.+@2365,1645 2390,1620 2470,1620 2495,1645 2495,1653.5 C9.2@2497.5,1651 ; C2.+@2375,1664.12 2375,1700 L2.2@2435,1760 ; 2400,1656 2410,1646
  Top Layer w11: C9.2@2497.5,1651 2515,1633.5 2515,1620 2540,1595 U1.41@2577.78,1595
VDDPLL: C32.2 C33.+ L5.2 U1.34 | length 729.7
  Top Layer w10: C33.+@2290,1841 2260.94,1811.94 2260.94,1795.06 v1(2265,1791) 2270,1791 2290,1771 C32.2@2305,1771 ; v1(2650,1670) 2650,1681 2697.86,1728.86 U1.34@2697.86,1755.2
  Top Layer w24: L5.2@2223.31,1904 2266.94,1904 C33.+@2290.94,1880
  Bottom Layer w10: v1(2265,1791) 2278,1778 2438,1778 2531,1685 2613.18,1685 2620,1678.18 2633.18,1678.18 2641.36,1670 v1(2650,1670)
VIN: C41.+ IC2.5 L6.1 PC1.+ POWER.8 R10.1 RN4.6 | length 1939.7
  Top Layer w10: RN4.6@2004.25,1528.43 2004.25,1525.65 v1(2039.9,1490) v1@2044.95,1484.95 ; C41.+@2148.12,766 2170,787.88 C41.+@2176.88,781 ; v1(2195,1400) 2195,1390 v1(2223.94,1361.06) ; v1(3920,835) 3920,831 POWER.8@3965,786
  Top Layer w24: IC2.5@2040,870 2065,870 v2@2075,860 ; v2(2085,871) 2085,811 2084,811 R10.1@2105,790 ; R10.1@2110,780 2124,766 C41.+@2148.12,766 ; C41.+@2176.88,781 2211.88,816 v2(2260,816)
  Top Layer w40: L6.1@1165,776 1288.98,776 PC1.+@1335,822.02
  Bottom Layer w10: v1(2039.9,1490) 2129.9,1400 v1(2195,1400) ; v2(2255,976) v2@2255,981 ; v2@2257.5,978.5 2260,976 v2(2260,816)
  Bottom Layer w12: v1(2223.94,1361.06) 2223.94,1363.94 2217.5,1357.5 2224,1351 2234,1351 2315,1270 2315,1170 2332.01,1152.99 2372.01,1152.99 2435,1090 2488,1090 2517,1061 2517,980.23 2492.77,956 2400,956 2340,1016 2303.23,1016 2255,967.77 v2(2255,976)
VIN+: D1.C DM1.C DM3.C DM5.C DM7.C L6.2 P1.2 U2.P$6 | length 491.1
  Top Layer w10: D1.C@1097.5,866 D1.C@1110,866 ; v3(4385,1696) 4416.54,1696 ; DM7.C@4432.5,1007.5 4407.5,1007.5 4385,985 v3(4385,975) 4385,965 4405,945 DM5.C@4446.54,945 ; DM1.C@4446.54,1661 4416.54,1691 4416.54,1696 ; DM3.C@4446.54,1726 4416.54,1696
  Top Layer w40: P1.2@1017.5,946 D1.C@1097.5,866 ; L6.2@1080,781 1080,811 1110,841 D1.C@1110,866
VUCAP: C38.1 IC6.27 | length 61.5
  Top Layer w10: IC6.27@1613.9,1620.15 C38.1@1659.14,1661.84
XIN: C22.2 U1.36 Y1.1 | length 875.2
  Top Layer w8: v1@2632.5,1767.5 2647.5,1782.5 2658.49,1771.51 U1.36@2658.49,1755.2
  Top Layer w10: Y1.1@1950,1740 1973.01,1763.01 2080,1763.01 ; C22.2@2080,1735 2080,1763.01 ; v1(2215,1801) 2215,1791 2187.01,1763.01 2080,1763.01
  Bottom Layer w10: v1(2215,1801) 2225,1801 2250,1826 2250,1861 2520,1861 2550,1831 2569,1831 v1(2630,1770)
XIN32: C24.2 U1.48 Y2.P$2 | length 636.3
  Top Layer w8: Y2.P$2@2245,1651.02 2272.52,1651.02 Y2.P$2@2277.5,1656 ; v1@2481.49,1521.49 2484.91,1521.49 2508.4,1498 2537,1498 2546.16,1488.84 2546.16,1468.42 2557.58,1457 2573.98,1457 U1.48@2577.78,1457.95
  Top Layer w10: C24.2@2185,1611 2185,1623.65 2221.35,1660 Y2.P$2@2245,1660 2270,1685 v1(2270,1710)
  Bottom Layer w10: v1(2270,1710) 2336,1710 2475,1571 v1(2475,1515)
XOUT: C21.2 U1.35 Y1.3 | length 1160.2
  Top Layer w8: U1.35@2678.18,1755.2 2677.98,1761 2677.98,1776.16 2711.66,1809.85 2715,1806.51 v1(2715,1818.51)
  Top Layer w10: Y1.3@2011.42,1630 2114.29,1630 2144.29,1660 C21.2@2160,1660 2195,1695 2195,1730 2240,1775 2240,1826 2226,1840 2175,1840 v1(2175,1820) ; 2170,1611 2185,1611
  Bottom Layer w10: v1(2175,1820) 2231,1876 2530,1876 2550,1856 2715,1856 v1(2715,1818.51)
XOUT32: C23.2 U1.49 Y2.P$1 | length 504.4
  Top Layer w8: v1@2440,1510 2465,1485 2525,1485 2535,1475 2535,1460 2545,1450 2545,1441 2547,1439 2573.98,1439 2573.98,1438.27 U1.49@2577.78,1438.27
  Top Layer w10: C23.2@2190,1520 2211,1541 Y2.P$1@2275,1541 ; 2270,1560 2270,1580 2296,1606 v1(2340,1606)
  Bottom Layer w10: v1(2340,1606) v1@2430.5,1515.5
  other v1: 2430,1515
XT1: C39.2 IC6.1 R9.1 Y4.1 | length 497.7
  Top Layer w10: Y4.1@1191.58,1416.58 1240,1465 1240,1496.3 1270,1526.3 C39.2@1270,1575 ; C39.2@1270,1566 1321,1566 R9.1@1326.9,1571.9 ; C39.2@1270,1585 1290,1605 1408.7,1605 1436.8,1576.9 IC6.1@1497.52,1576.9
XT2: C40.2 IC6.2 R9.2 Y4.3 | length 299.5
  Top Layer w10: Y4.3@1296,1496 1296,1526 1309.7,1526 1323.7,1540 1370,1540 R9.2@1390,1560 ; Y4.3@1310,1490 1320,1500 C40.2@1355,1500 ; R9.2@1395,1570 1405.79,1559.21 IC6.2@1488.54,1559.21 ; 1554.15,1555.5 1555.33,1553.92 1567.52,1552.21
XUSB: C26.1 F1.2 U1.39 USB1.1 | length 2330.4
  Top Layer w10: F1.2@857.46,1551 906,1551 945,1590 v1(945,1645) ; v1@950,1650 1060,1760 USB1.1@1060,1761.59 ; v1(1853,1808.77) 1853,1727 v1(1855,1725) ; v1(2425,1710) 2426,1711 2519,1711 2540,1690 2540,1650 U1.39@2555,1635
  Bottom Layer w10: v1(945,1645) 1065,1645 1250,1830 v1(1295,1830) 1415,1830 1520,1725 v1(1855,1725) ; v1(1853,1808.77) 1899.73,1855.5 1985.36,1855.5 1985.86,1856 2053.99,1856 2109,1800.99 2109,1736.8 2139.8,1706 2166,1706 2196,1736 2399,1736 v1(2425,1710)
XVCC: F2.2 J3.P1 | length 262.3
  Top Layer w16: J3.P1@916,1216 896,1236 896,1311 956,1311 F2.2@1026,1381
pads on no net: *.5@4752.36,891.04 *.5@4752.36,1221.75 *.7 FID1.P$1 FID3.P$1 FID4.P$1 IC6.5 IC6.6 IC6.7 IC6.12 IC6.14 IC6.24 IC6.25 U1.50 U1.69 U1.93 U1.117 U1.131 U1.138 U1.141 U1.143 U2.P$3 U2.P$18 U2.P$22 U2.P$23 U4.1 U5.1 USB1.
copper on no net: | length 425.9
  Top Layer w10: 1222.34,1071 1241,1071 ; 2975,1140 3050,1215 3330,1215 v1(3345,1230)

## Keep-outs
Keep-Out Layer:
  lines w10: 987.35,735 4775,735 ; 987.35,739 cw(c987.35,778.37) 947.98,778.37 947.98,922.02 925,945 810,945 790,965 790,1915 811,1936 4807.98,1936 4807.98,778.37 cw(c4768.61,778.37) 4768.61,739

## Silkscreen, mask and mechanical layers (free items; w line width, h text height)
Top Overlay:
  circle w12: c1647.98,1761 r7.07
  lines w8: 1755.98,2421 1755.98,2455 1763.98,2455 1763.98,2423 1791.98,2395 1819.98,2395 1819.98,2387 1789.98,2387 1755.98,2421
  lines w12: 1962.98,2549 1997.98,2514 2407.98,2514 ; 2627.98,2514 3067.98,2514 3107.98,2554 ; 2784.98,1003 2812.98,1031 2932.98,1031 ; 3212.98,2399 3257.98,2354 3307.98,2354 ; 3615.98,1031 4028.98,1031 4051.98,1008 ; 4092.98,2354 4162.98,2354 4207.98,2399 ; 4302.98,1644 4302.98,1184 4342.98,1144 ; 4302.98,2059 4302.98,2599 4342.98,2639 ; 4507.98,964 4507.98,944 4607.98,944 4607.98,964 ; 4507.98,2789 4507.98,2814 4607.98,2814 4607.98,2789
  lines w16: 3182.98,2539 3207.98,2589 3232.98,2539 ; 3182.98,2539 3207.98,2539 ; 3182.98,2539 3207.98,2564 ; 3207.98,2539 3207.98,2564 ; 3207.98,2539 3232.98,2539 ; 3207.98,2564 3232.98,2539 ; 3282.98,2589 3307.98,2589 ; 3282.98,2589 3307.98,2539 3332.98,2589 ; 3282.98,2589 3307.98,2564 ; 3307.98,2564 3332.98,2589 ; 3307.98,2564 3307.98,2589 ; 3307.98,2589 3332.98,2589
  text "M.Banzi" at 787.98,2839 h45 r180
  text "5V" at 4487.98,2824 h44 r180
  text "D.Cuartielles" at 787.98,2759 h45 r180
  text "T.Igoe" at 787.98,2679 h45 r180
  text "9" at 2382.98,2614 h56 r90
  text "8" at 2482.98,2614 h56 r90
  text "7" at 2632.98,2614 h56 r90
  text "6" at 2732.98,2614 h56 r90
  text "5" at 2832.98,2614 h56 r90
  text "4" at 2932.98,2614 h56 r90
  text "3" at 3032.98,2614 h56 r90
  text "2" at 3132.98,2614 h56 r90
  text "1" at 3232.98,2614 h56 r90
  text "0" at 3332.98,2614 h56 r90
  text "22" at 4357.98,2614 h56
  text "G.Martino" at 787.98,2599 h45 r180
  text "14" at 3532.98,2579 h56 r90
  text "15" at 3632.98,2579 h56 r90
  text "16" at 3732.98,2579 h56 r90
  text "17" at 3832.98,2579 h56 r90
  text "18" at 3932.98,2579 h56 r90
  text "19" at 4032.98,2579 h56 r90
  text "20" at 4132.98,2579 h56 r90
  text "21" at 4232.98,2579 h56 r90
  text "13" at 1982.98,2564 h56 r90
  text "12" at 2082.98,2564 h56 r90
  text "11" at 2182.98,2564 h56 r90
  text "10" at 2282.98,2564 h56 r90
  text "GND" at 1887.23,2529.48 h56 r90
  text "D.Mellis" at 787.98,2519 h45 r180
  text "24" at 4357.98,2514 h56
  text "SCL1" at 1589.81,2482.48 h56 r90
  text "SDA1" at 1681.81,2482.48 h56 r90
  text "AREF" at 1781.81,2482.48 h56 r90
  text "PWM" at 2432.98,2481 h66
  text "26" at 4357.98,2414 h56
  text "TX" at 3232.98,2409 h56 r90
  text "RX" at 3332.98,2409 h56 r90
  text "TX0" at 3532.98,2409 h56 r90
  text "RX0" at 3632.98,2409 h56 r90
  text "TX1" at 3732.98,2409 h56 r90
  text "RX1" at 3832.98,2409 h56 r90
  text "TX2" at 3932.98,2409 h56 r90
  text "RX3" at 4032.98,2409 h56 r90
  text "SDA" at 4132.98,2409 h56 r90
  text "SCL" at 4232.98,2409 h56 r90
  text "28" at 4357.98,2314 h56
  text "30" at 4357.98,2214 h56
  text "31" at 4682.98,2214 h56
  text "32" at 4357.98,2114 h56
  text "33" at 4682.98,2114 h56
  text "34" at 4357.98,2014 h56
  text "35" at 4682.98,2014 h56
  text "1" at 3267.65,1968.52 h50 r180
  text "36" at 4357.98,1914 h56
  text "37" at 4682.98,1914 h56
  text "38" at 4357.98,1814 h56
  text "39" at 4682.98,1814 h56
  text "MADE IN" at 4887.98,1765 h60
  text "40" at 4357.98,1714 h56
  text "41" at 4682.98,1714 h56
  text "ITALY" at 4954.98,1693 h60
  text "DIGITAL" at 4332.98,1664 h66 r90
  text "42" at 4357.98,1614 h56
  text "43" at 4657.98,1614 h56
  text "44" at 4357.98,1514 h56
  text "45" at 4657.98,1514 h56
  text "46" at 4357.98,1414 h56
  text "47" at 4682.98,1414 h56
  text "48" at 4357.98,1314 h56
  text "49" at 4682.98,1314 h56
  text "Arduino" at 3165.98,1223 h80
  text "50" at 4357.98,1214 h56
  text "51" at 4682.98,1214 h56
  text "52" at 4357.98,1114 h56
  text "53" at 4682.98,1114 h56
  text "DUE" at 3289.98,1113 h90
  text "www.arduino.cc" at 3594.98,1088 h65
  text "ANALOG   IN" at 2958.98,993 h66
  text "GND" at 4647.98,939 h56
  text "0" at 2837.98,924 h56 r90
  text "1" at 2927.98,924 h56 r90
  text "2" at 3037.98,924 h56 r90
  text "3" at 3137.98,924 h56 r90
  text "4" at 3237.98,924 h56 r90
  text "5" at 3332.98,924 h56 r90
  text "6" at 3432.98,924 h56 r90
  text "7" at 3537.98,924 h56 r90
  text "8" at 3737.98,924 h56 r90
  text "9" at 3837.98,924 h56 r90
  text "10" at 3937.98,924 h56 r90
  text "11" at 4029.98,924 h56 r90
  text "5V" at 2267.46,907.17 h56
  text "GND" at 2387.46,907.17 h56
  text "VIN" at 2559.46,907.17 h56
  text "IOREF" at 2036.81,906.48 h56 r90
  text "RESET" at 2136.81,906.48 h56 r90
  text "3V3" at 2236.81,906.48 h56 r90
  text "DAC0" at 4125.98,900 h40 r90
  text "DAC1" at 4225.98,900 h40 r90
  text "CANRX" at 4325.98,900 h40 r90
  text "CANTX" at 4420.98,900 h40 r90
Mechanical 2:
  text "USBVCCU2" at 947.98,1571 h40
  text "PC2" at 3695.98,1423 h40
  text "PC1" at 1697.98,941 h40

## Text inside footprints (layer, text, board x,y; h text height)
IC4: Top Overlay "3" at 1707,1140.81 h32 r270; Top Overlay "4" at 1977,1106 h32 r270; Top Overlay "1" at 1707,1316.93 h32 r270; Top Overlay "2" at 1706.63,1231.81 h32 r270
IC6: Top Overlay "1" at 1462.95,1588.74 h32
J3: Top Overlay "PCB" at 785,975 h40 r270
USB1: Top Overlay "PCB" at 788,1942.99 h40 r180